# EAGLE board TM (EAGLE 6.6.0)
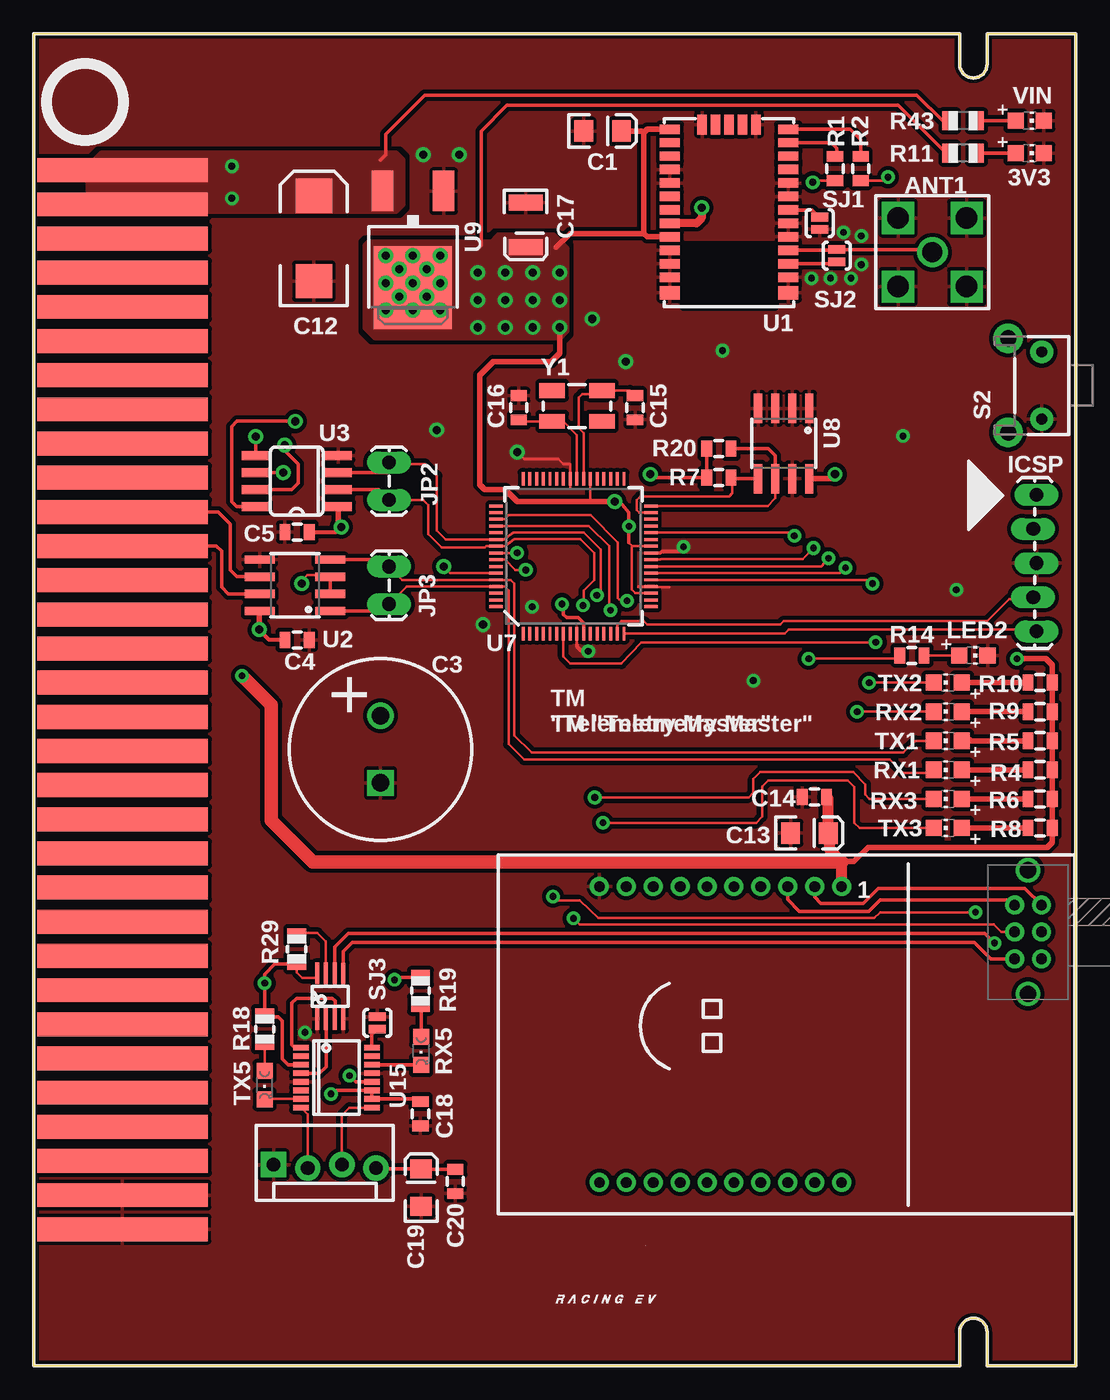
[diagram p0: board, top side]
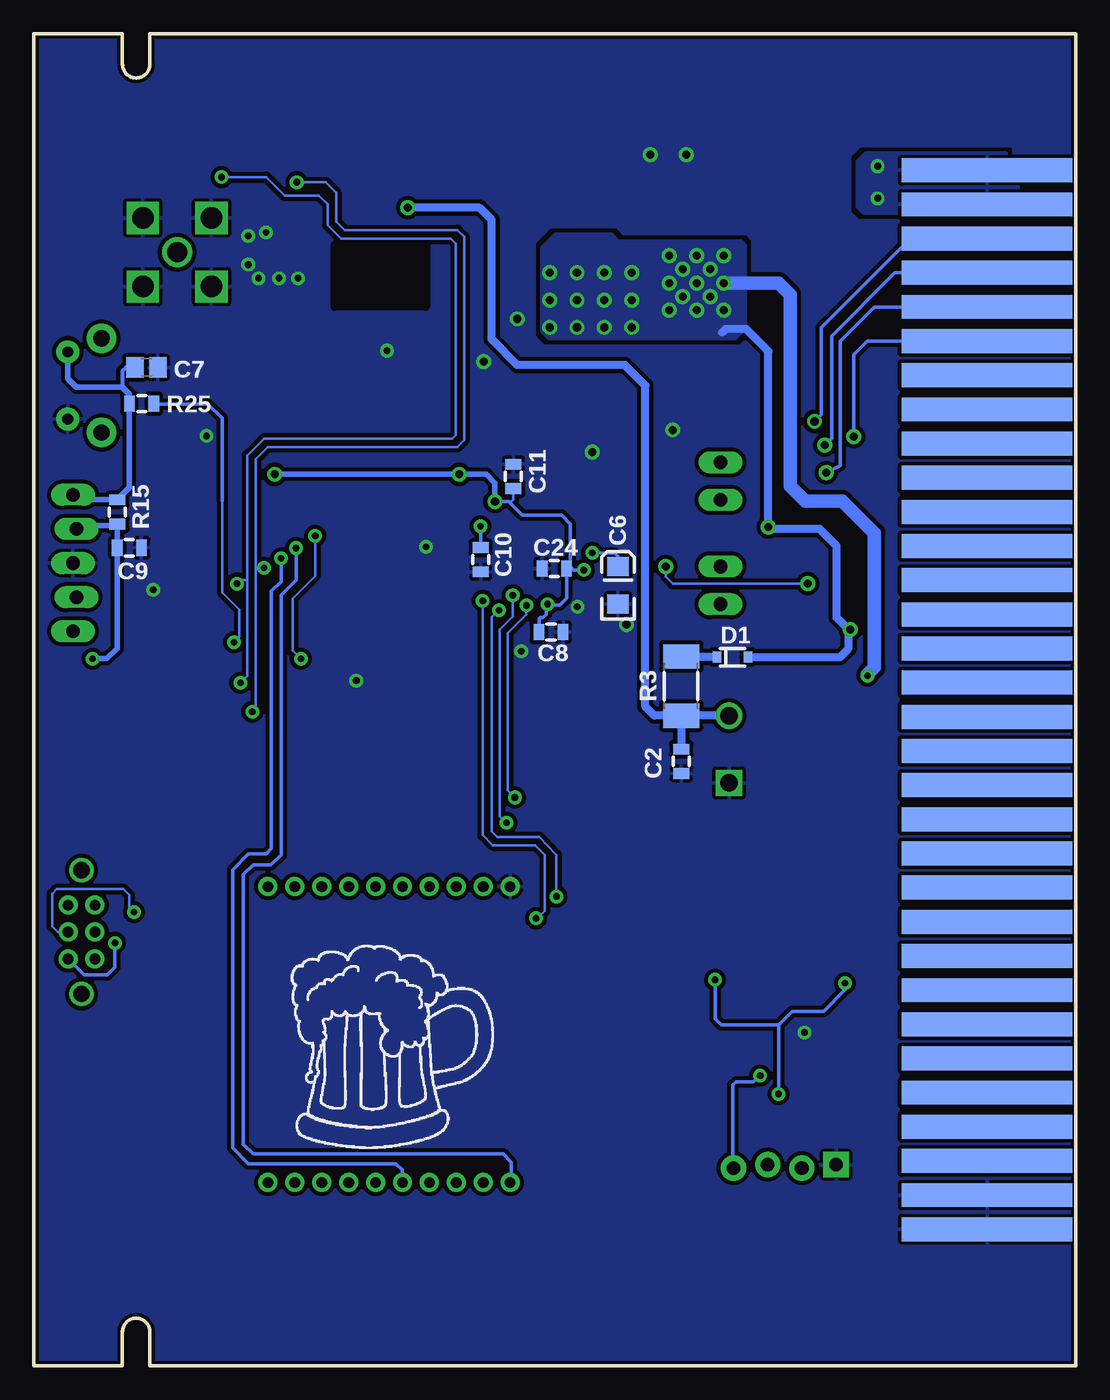
[diagram p1: board, bottom side, seen from below]

Size 77.47 x 99.06 mm. Coordinates in mm from the lower left corner, seen from the top.
Copper layers (1*16): Top 0.035mm / dielectric 1.5mm / Bottom 0.035mm
Design rules "SparkFun *": minimum track width 8mil, minimum drill 19mil, track to track 8mil, track to pad 8mil, pad to pad 8mil, via to via 8mil, smd to smd 8mil, copper to edge 10mil, drill to drill 8mil, minimum pad ring 12mil, minimum via ring 10mil, stop-mask expansion 4mil, vias tented up to drill 25mil, thermal gap 10mil

## Footprints (pad centres in the part's own frame; a part is rotated, then mirrored left to right if it is on the bottom)
CHIP-LED0805 = smd 1.2 x 1.2: A 0,-1.05; C 0,1.05
CONSMA002 = drill 1.6 square: 1 -2.55,2.55; 2 2.55,2.55; 3 2.55,-2.55; 4 -2.55,-2.55 | drill 1.5: C 0,0
EIA3216 = smd 1.4 x 1.6: A 1.4,0; C -1.4,0
0805 = smd 0.8 x 1.2: 1 -0.9,0; 2 0.9,0
DB-5R5D224T = drill 1.3: + 2.5,0 | drill 1.3 square: - -2.5,0
C0805 = smd 1.3 x 1.5: 1 -0.85,0; 2 0.85,0
EIA7343 = smd 2.55 x 2.7: A 3.17,0; C -3.17,0
EIA3528 = smd 1.2 x 2.5: A 1.65,0; C -1.65,0
CARD-64 = smd 1.778 x 12.7: 1 10.16,6.604; 2 12.7,6.604; 3 15.24,6.604; 4 17.78,6.604; 5 20.32,6.604; 6 22.86,6.604; 7 25.4,6.604; 8 27.94,6.604; 9 30.48,6.604; 10 33.02,6.604; 11 35.56,6.604; 12 38.1,6.604; 13 40.64,6.604; 14 43.18,6.604; 15 45.72,6.604; 16 48.26,6.604; 17 50.8,6.604; 18 53.34,6.604; 19 55.88,6.604; 20 58.42,6.604; 21 60.96,6.604; 22 63.5,6.604; 23 66.04,6.604; 24 68.58,6.604; 25 71.12,6.604; 26 73.66,6.604; 27 76.2,6.604; 28 78.74,6.604; 29 81.28,6.604; 30 83.82,6.604; 31 86.36,6.604; 32 88.9,6.604 | smd 1.778 x 12.7 bottom: 33 10.16,6.604; 34 12.7,6.604; 35 15.24,6.604; 36 17.78,6.604; 37 20.32,6.604; 38 22.86,6.604; 39 25.4,6.604; 40 27.94,6.604; 41 30.48,6.604; 42 33.02,6.604; 43 35.56,6.604; 44 38.1,6.604; 45 40.64,6.604; 46 43.18,6.604; 47 45.72,6.604; 48 48.26,6.604; 49 50.8,6.604; 50 53.34,6.604; 51 55.88,6.604; 52 58.42,6.604; 53 60.96,6.604; 54 63.5,6.604; 55 66.04,6.604; 56 68.58,6.604; 57 71.12,6.604; 58 73.66,6.604; 59 76.2,6.604; 60 78.74,6.604; 61 81.28,6.604; 62 83.82,6.604; 63 86.36,6.604; 64 88.9,6.604
SOD-323 = smd 0.63 x 0.83: 1 -1.15,0; 2 1.15,0
1X05_LOCK_LONGPADS = drill 1.016 long: 1 0,0; 2 2.54,-0.254; 3 5.08,0; 4 7.62,-0.254; 5 10.16,0
1X02_LOCK_LONGPADS = drill 1.016 long: 1 -0.127,0; 2 2.667,0
MOLEX-1X4_LOCK = drill 1.016 pad 1.88 square: 1 0,0.127 | drill 1.016 pad 1.88: 2 2.54,-0.127; 3 5.08,0.127; 4 7.62,-0.127
R2010 = smd 1.8 x 2.7: 1 -2.2,0; 2 2.2,0
R0805 = smd 1.1 x 1.4: 1 -1,0; 2 1,0
CHIPLED_0805 = smd 1.2 x 1.2: A 0,-1.05; C 0,1.05
EG2211 = drill 0.8: P1 -1,0; P1-TA -1,2; P1-TB -1,-2; P2 1,0; P2-TA 1,2; P2-TB 1,-2 | drill 1.2: P$7 0,4.6; P$8 0,-4.6
TACTILE-PTH-SIDEEZ = drill 0.8 pad 1.7: 1 -2.5,0; 2 2.5,0 | drill 1.2 pad 2.2: ANCHOR1 -3.5,2.5; ANCHOR2 3.5,2.5
SJ_2S-NO = smd 0.635 x 1.27: 1 -0.45,0; 2 0.45,0
PAD-JUMPER-2-NO_YES_SILK = smd 0.635 x 1.27: 1 -0.45,0; 2 0.45,0
CAM-M8Q = smd 1.5 x 0.7: 1 4.4,0; 2 4.4,1; 3 4.4,2; 4 4.4,3; 5 4.4,4; 6 4.4,5; 7 4.4,6; 8 4.4,7; 9 4.4,8; 10 4.4,9; 11 4.4,10; 12 4.4,11; 15 -4.4,11; 16 -4.4,10; 17 -4.4,9; 18 -4.4,8; 19 -4.4,7; 20 -4.4,6; 21 -4.4,5; 22 -4.4,4; 23 -4.4,3; 24 -4.4,2; 25 -4.4,1; 26 -4.4,0 | smd 1.5 x 1: 13 4.4,12.15; 14 -4.4,12.15 | smd 0.7 x 1.5: 27 -2,-0.35; 28 -1,-0.35; 29 0,-0.35; 30 1,-0.35; 31 2,-0.35
SO-8 = smd 0.61 x 2.21: 1 -1.905,-2.616; 2 -0.635,-2.616; 3 0.635,-2.616; 4 1.905,-2.616; 5 1.905,2.616; 6 0.635,2.616; 7 -0.635,2.616; 8 -1.905,2.616
SO08 = smd 0.66 x 2.032: 1 -1.905,-3.073; 2 -0.635,-3.073; 3 0.635,-3.073; 4 1.905,-3.073; 5 1.905,3.073; 6 0.635,3.073; 7 -0.635,3.073; 8 -1.905,3.073
VFSOP-8 = smd 0.3 x 1.6: 1 -0.98,-1.7; 2 -0.33,-1.7; 3 0.33,-1.7; 4 0.98,-1.7; 5 0.97,1.69; 6 0.325,1.7; 7 -0.33,1.7; 8 -0.98,1.71
RM024-TH = drill 0.8: 1 9,11; 2 7,11; 3 5,11; 4 3,11; 5 1,11; 6 -1,11; 7 -3,11; 8 -5,11; 9 -7,11; 10 -9,11; 11 -9,-11; 12 -7,-11; 13 -5,-11; 14 -3,-11; 15 -1,-11; 16 1,-11; 17 3,-11; 18 5,-11; 19 7,-11; 20 9,-11
TQFP-64 = smd 0.22 x 1: 1 -3.75,-5.75; 2 -3.25,-5.75; 3 -2.75,-5.75; 4 -2.25,-5.75; 5 -1.75,-5.75; 6 -1.25,-5.75; 7 -0.75,-5.75; 8 -0.25,-5.75; 9 0.25,-5.75; 10 0.75,-5.75; 11 1.25,-5.75; 12 1.75,-5.75; 13 2.25,-5.75; 14 2.75,-5.75; 15 3.25,-5.75; 16 3.75,-5.75; 33 3.75,5.75; 34 3.25,5.75; 35 2.75,5.75; 36 2.25,5.75; 37 1.75,5.75; 38 1.25,5.75; 39 0.75,5.75; 40 0.25,5.75; 41 -0.25,5.75; 42 -0.75,5.75; 43 -1.25,5.75; 44 -1.75,5.75; 45 -2.25,5.75; 46 -2.75,5.75; 47 -3.25,5.75; 48 -3.75,5.75 | smd 1 x 0.22: 17 5.75,-3.75; 18 5.75,-3.25; 19 5.75,-2.75; 20 5.75,-2.25; 21 5.75,-1.75; 22 5.75,-1.25; 23 5.75,-0.75; 24 5.75,-0.25; 25 5.75,0.25; 26 5.75,0.75; 27 5.75,1.25; 28 5.75,1.75; 29 5.75,2.25; 30 5.75,2.75; 31 5.75,3.25; 32 5.75,3.75; 49 -5.75,3.75; 50 -5.75,3.25; 51 -5.75,2.75; 52 -5.75,2.25; 53 -5.75,1.75; 54 -5.75,1.25; 55 -5.75,0.75; 56 -5.75,0.25; 57 -5.75,-0.25; 58 -5.75,-0.75; 59 -5.75,-1.25; 60 -5.75,-1.75; 61 -5.75,-2.25; 62 -5.75,-2.75; 63 -5.75,-3.25; 64 -5.75,-3.75
SO08' = smd 0.61 x 2.21: 1 -1.905,-2.616; 2 -0.635,-2.616; 3 0.635,-2.616; 4 1.905,-2.616; 5 1.905,2.616; 6 0.635,2.616; 7 -0.635,2.616; 8 -1.905,2.616
V-REG_DPACK = smd 1.6 x 3: 1 -2.28,-4.8; 3 2.28,-4.8 | smd 5.8 x 6.2: 4 0,2.38
SSOP-16 = smd 0.419 x 1.143: 1 -2.223,-2.642; 2 -1.587,-2.642; 3 -0.953,-2.642; 4 -0.318,-2.642; 5 0.318,-2.642; 6 0.953,-2.642; 7 1.587,-2.642; 8 2.223,-2.642; 9 2.223,2.642; 10 1.587,2.642; 11 0.953,2.642; 12 0.318,2.642; 13 -0.318,2.642; 14 -0.953,2.642; 15 -1.587,2.642; 16 -2.223,2.642
CRYSTAL-SMD-5X3 = smd 1.9 x 1.1: 1 -1.85,-1.15; 2 1.85,-1.15; 3 1.85,1.15; 4 -1.85,1.15

## Placement (x,y rotation side)
3V3  [CHIP-LED0805]  74.04,90.17 270 top
ANT1  CONMCX002  [CONSMA002]  66.8,82.8 0 top
C1  10uF  [EIA3216]  42.29,91.82 0 top
C2  1uF  [0805]  29.34,44.96 270 bottom
C3  DB-5R5D224T  [DB-5R5D224T]  25.78,45.85 90 top
C4  0.1uF  [0805]  19.58,53.98 0 top
C5  0.1uF  [0805]  19.58,62 180 top
C6  10uF  [EIA3216]  34.04,58.04 90 bottom
C7  10n  [C0805]  69.09,74.24 0 bottom
C8  0.1uF  [0805]  39.01,54.56 0 bottom
C9  0.1uF  [0805]  70.36,60.83 0 bottom
C10  0.1uF  [0805]  44.25,59.94 270 bottom
C11  0.1uF  [0805]  41.81,66.14 270 bottom
C12  10uF  [EIA7343]  20.83,83.82 90 top
C13  10uF  [EIA3216]  57.66,39.62 0 top
C14  1uF  [0805]  58.04,42.29 180 top
C15  12pF  [0805]  44.7,71.25 270 top
C16  12pF  [0805]  36.07,71.25 90 top
C17  10uf  [EIA3528]  36.58,84.84 270 top
C18  0.1uf  [0805]  28.75,18.75 270 top
C19  4.7uF  [EIA3216]  28.8,13.26 90 top
C20  0.1uf  [0805]  31.34,13.72 270 top
C24  0.1uF  [0805]  38.76,59.28 180 bottom
CARD2  CARD  [CARD-64]  0,99.06 270 top
D1  BAS316-TP  [SOD-323]  25.53,52.7 0 bottom
ICSP  ICSP  [1X05_LOCK_LONGPADS]  74.55,64.77 270 top
JP2  M02LOCK_LONGPADS  [1X02_LOCK_LONGPADS]  26.42,67.06 270 top
JP3  M02LOCK_LONGPADS  [1X02_LOCK_LONGPADS]  26.42,59.31 270 top
JP13  [MOLEX-1X4_LOCK]  17.83,14.83 0 top
LED2  [CHIP-LED0805]  69.85,52.83 270 top
R1  220  [0805]  59.56,89.03 270 top
R2  220  [0805]  61.47,89.03 270 top
R3  50  [R2010]  29.34,50.55 90 bottom
R4  1k  [0805]  74.8,44.32 180 top
R5  1k  [0805]  74.8,46.48 180 top
R6  1k  [0805]  74.8,42.16 180 top
R7  2k  [0805]  50.93,66.04 180 top
R8  1k  [0805]  74.8,40.01 180 top
R9  1k  [0805]  74.8,48.64 180 top
R10  1k  [0805]  74.8,50.8 180 top
R11  499  [R0805]  69.09,90.17 180 top
R14  499  [0805]  65.28,52.83 180 top
R15  10k  [0805]  71.25,63.5 270 bottom
R18  1K  [R0805]  17.17,25.04 90 top
R19  1k  [R0805]  28.75,27.89 90 top
R20  2k  [0805]  50.93,68.2 180 top
R25  499  [0805]  69.44,71.55 0 bottom
R29  1K  [R0805]  19.56,30.99 270 top
R43  1k  [R0805]  69.09,92.58 180 top
RX1  [CHIP-LED0805]  67.94,44.32 90 top
RX2  [CHIP-LED0805]  67.94,48.64 90 top
RX3  [CHIP-LED0805]  67.94,42.16 90 top
RX5  [CHIPLED_0805]  28.8,23.42 180 top
S1  [EG2211]  73.91,32.26 180 top
S2  ts  [TACTILE-PTH-SIDEEZ]  74.93,72.9 90 top
SJ1  NO  [SJ_2S-NO]  58.42,84.96 90 top
SJ2  NO  [SJ_2S-NO]  59.69,82.55 90 top
SJ3  [PAD-JUMPER-2-NO_YES_SILK]  25.55,25.5 270 top
TX1  [CHIP-LED0805]  67.94,46.48 90 top
TX2  [CHIP-LED0805]  67.94,50.8 90 top
TX3  [CHIP-LED0805]  67.94,40.01 90 top
TX5  [CHIPLED_0805]  17.17,20.88 180 top
U1  CAM-M8Q  [CAM-M8Q]  51.69,91.95 180 top
U2  SN75HVD08DR  [SO-8]  19.43,58.04 90 top
U3  ISL83077  [SO08]  19.56,65.79 90 top
U4  SN74LVC2G241DCTR  [VFSOP-8]  22.05,27.48 0 top
U5  RM024  [RM024-TH]  51.05,24.64 0 top
U7  DSPIC33EP256GM306  [TQFP-64]  40.13,60.2 0 top
U8  CAT24M01WI-GT3  [SO08']  55.75,68.58 180 top
U9  NCP1117DT33T5G  [V-REG_DPACK]  28.19,82.55 180 top
U15  FT230X  [SSOP-16]  22.5,21.44 270 top
U$1  BEERM  [B-M]  58.32,16.15 0 bottom
U$2  LOGO  [L-MS]  35.81,3.86 0 top
U$3  INDPK1  [PICKIT-PIN-1]  72.03,64.72 90 top
VIN  [CHIP-LED0805]  74.04,92.58 270 top
Y1  12Mhz  [CRYSTAL-SMD-5X3]  40.39,71.37 180 top

## Library data of the parts
3V3 C7 LED2 R11 R18 R19 R29 R43 RX1-RX3 RX5 TX1-TX3 TX5 VIN = adafruit
ANT1 C3 CARD2 U1 U2 U5 U7 U15 U$3 = FSAE Eletric
C1 C2 C13 C14 R1-R10 R14 R15 R20 SJ1-SJ3 = SparkFun-Passives
C4 C5 C8-C12 C15-C17 C24 = SparkFun-Capacitors
C6 = SparkFun-Capacitors; PROD_ID: CAP-00811
C18-C20 = SparkFun
D1 = SparkFun-DiscreteSemi
ICSP JP2 JP3 JP13 = SparkFun-Connectors
R25 = SparkFun-Resistors
S1 S2 = SparkFun-Electromechanical
U3 = NASA_LIB
U4 = Cleaverbrooks
U8 = SparkFun-DigitalIC
U9 = SparkFun-PowerIC
U$1 U$2 = Pic
Y1 = SparkFun-FreqCtrl

## Nets
3V: C18.1 R18.2 R19.2 R29.2 U4.8 U15.3 U15.10 U15.11
+3V3: C1.A C4.1 C5.1 C8.1 C9.1 C10.1 C11.2 C13.A C14.1 C17.A C24.1 D1.2 ICSP.2 R4.1 R5.1 R6.1 R7.2 R8.1 R9.1 R10.1 R11.2 R15.2 R20.2 U1.1 U1.9 U2.8 U3.1 U5.1 U7.10 U7.19 U7.26 U7.38 U7.57 U8.8 U9.4
+9V: C12.A CARD2.1 CARD2.2 CARD2.33 CARD2.34 R43.2 U9.3
CONNECTED: U5.15 U7.23
GND: 3V3.C ANT1.1 ANT1.2 ANT1.3 ANT1.4 C1.C C2.2 C3.- C4.2 C5.2 C6.C C7.2 C8.2 C9.2 C10.2 C11.1 C12.C C13.C C14.2 C15.2 C16.2 C17.C C18.2 C19.C C20.2 C24.2 CARD2.31 CARD2.32 CARD2.63 CARD2.64 ICSP.3 JP13.1 LED2.C S2.1 SJ1.1 SJ3.1 U1.4 U1.5 U1.10 U1.11 U1.12 U1.13 U1.14 U1.15 U1.18 U1.19 U1.21 U1.22 U1.27 U1.31 U2.5 U3.4 U4.1 U4.4 U5.10 U7.9 U7.20 U7.25 U7.41 U8.1 U8.2 U8.3 U8.4 U8.7 U9.1 U15.5 U15.13 VIN.C
GPS-RX: R2.2 TX2.C U7.21
GPS-TX: R1.2 RX2.C U7.22
HORNEN: U7.49
INRG: U7.50
N$1: R9.2 RX2.A
N$2: R1.1 U1.25
N$3: ANT1.C SJ2.2 U1.17
N$4: R2.1 U1.26
N$5: SJ1.2 U1.20
N$6: D1.1 R3.2
N$7: 3V3.A R11.1
N$8: C2.1 C3.+ R3.1 U1.8
N$9: R6.2 RX3.A
N$10: R8.2 TX3.A
N$11: R18.1 TX5.A
N$12: R14.2 U7.28
N$13: C16.1 U7.40 Y1.3
N$14: C15.1 U7.39 Y1.1
N$15: LED2.A R14.1
N$16: R7.1 U7.31 U8.5
N$17: SJ2.1 U1.16
N$18: R19.1 RX5.A
N$19: TX5.C U15.7
N$20: RX5.C U15.14
N$21: U4.2 U15.4
N$22: R4.2 RX1.A
N$23: R5.2 TX1.A
N$24: R10.2 TX2.A
N$27: U4.3 U15.1
N$28: JP13.3 U15.9
N$32: R20.1 U7.32 U8.6
N$33: R43.1 VIN.A
N$61: JP13.2 U15.8
N$62: SJ3.2 U15.16
N$69: R29.1 U4.7
N$85: C19.A C20.1 JP13.4 U15.12
N$86: C7.1 ICSP.1 R15.1 R25.1 S2.2
N$87: R25.2 U7.7
N$88: C6.A U7.56
N$90: ICSP.4 U7.15
N$91: ICSP.5 U7.16
RS-TM-A: CARD2.35 U3.8
RS-TM-B: CARD2.36 U3.7
RS-TM-Y: CARD2.38 U3.5
RS-TM-Z: CARD2.37 U3.6
RX: S1.P1 U7.52
RXD0: JP3.2 RX1.C U2.1 U7.61
RXD2: JP2.2 RX3.C U3.2 U7.55
RXD3: S1.P1-TA U4.6
RXD4: S1.P1-TB U5.2
SETUP: U5.11 U7.24
TSA: CARD2.11 U2.6
TSB: CARD2.12 U2.7
TX: S1.P2 U7.51
TXD0: JP3.1 TX1.C U2.4 U7.60
TXD2: JP2.1 TX3.C U3.3 U7.54
TXD3: S1.P2-TA U4.5
TXD4: S1.P2-TB U5.3
U3-EN: U2.2 U2.3 U7.59

## Tracks (layer width: path | path; a pad name or v marks a point on that pad's centre or on a via)
3V  (via drill 0.5)
  Top 0.203: R29.2 19.56,29.26 19.96,28.85 20.88,28.85 21.08,28.65 21.08,29.18 U4.8
  Top 0.254: R29.2 19.44,29.87 17.93,29.87 17.17,29.11 v17.17,28.45 R18.2 17.26,25.96 18.19,25.96 18.49,25.65 18.49,22.81 18.91,22.39 U15.3 | C18.1 28.55,19.85 U15.10 U15.11 22.36,20.48 v22.1,20.22 | R19.2 27.01,28.89 v26.82,28.7
  Bottom 0.254: v22.1,20.22 22.1,25.3 | 22.1,25.3 22.1,25.35 21.08,26.36 18.75,26.36 17.17,27.94 v17.17,28.45 | v26.82,28.7 26.82,25.81 26.36,25.35 22.15,25.35 22.1,25.3
+3V3  (via drill 0.5, 0.6)
  Top 0.203: U7.38 41.38,64.28 41.4,64.26 | U7.57 35.05,59.95 35.81,59.18 v36.58,59.18 | U7.26 44.51,60.95 | 44.51,60.95 44.25,61.21 | U7.19 44.71,57.45 44.45,57.71 44.45,60.88 44.51,60.95
  Top 0.254: R20.2 R7.2 46.1,66.04 v45.85,66.29 | R11.2 67.82,90.17 64.26,93.73 35.18,93.73 33.27,91.82 33.27,83.31 33.02,83.06 | U7.10 40.88,55.23 40.49,55.63 39.62,55.63 39.37,55.88 39.37,56.54 v39.27,56.64 | 44.25,61.21 v44.25,62.43 44.25,63.45 43.59,64.21 43.23,64.21 v43.18,64.26
  Top 0.305: C5.1 22.5,62 v22.86,62.36 | C4.1 17.53,53.98 v16.76,54.74
  Top 0.406: U3.1 22.63,62.59 v22.86,62.36 | v16.76,54.74 16.76,56.08 U2.8 | U1.9 45.59,83.95 45.34,84.2 | 45.34,84.2 45.34,91.69 | 45.34,91.69 45.59,91.95 U1.1 | C1.A 45.21,91.82 45.34,91.69 | 45.34,84.2 39.88,84.2 38.86,83.19 | U8.8 59.23,65.96 v59.56,66.29 | v39.12,77.22 39.12,75.31 38.48,74.68 34.16,74.68 33.15,73.66 33.15,65.53 33.53,65.15 35.05,65.15 35.94,64.26 41.4,64.26 v43.18,64.26 | 60.05,37.48 60.06,37.49 60.96,37.49 62.03,38.56 75.34,38.56 75.7,38.92 75.7,39.42 R8.1 R6.1 R4.1 R5.1 R9.1 R10.1 75.7,52.11 75.23,52.58 v73.1,52.58
  Top 0.813: U5.1 60.05,37.48 59.18,38.35 59.18,39.5 C13.A 59.06,42.17 C14.1
  Top 1.016: 60.05,37.48 20.73,37.48 17.68,40.54 17.68,49.12 v15.49,51.31
  Bottom 0.203: C11.2 41.81,64.41 41.96,64.26 42.32,64.26 | C24.1 37.74,59.28 37.59,59.44
  Bottom 0.254: v36.58,59.18 37.34,59.18 37.59,59.44 37.59,62.61 38.23,63.25 41.15,63.25 42.16,64.26 42.32,64.26 v43.18,64.26 43.23,63.96 | C8.1 39.88,54.6 39.88,55.58 39.83,55.63 39.62,55.63 39.37,55.88 39.37,56.54 v39.27,56.64 39.22,56.59 38.35,56.59 37.86,57.09 C24.1 | C10.1 v44.25,62.43
  Bottom 0.406: v59.56,66.29 v45.85,66.29 43.81,66.29 43.18,65.66 v43.18,64.26 | C9.1 71.26,61.42 | 71.26,61.42 71.26,62.59 R15.2 71.36,62.48 73.28,62.48 73.53,62.23 ICSP.2 | v73.1,52.58 72.03,52.58 71.27,53.34 71.27,61.4 71.26,61.42
  Bottom 0.61: D1.2 17.53,52.7 16.89,53.34 16.89,54.61 v16.76,54.74 16.89,54.74 17.78,55.63 17.78,60.96 19.05,62.23 22.73,62.23 v22.86,62.36 22.86,75.44 24.51,77.09 26.04,77.09 26.29,76.83
  Bottom 1.016: v15.49,51.31 15.49,51.41 14.99,51.92 14.99,61.92 17.37,64.31 20.12,64.31 21.23,65.43 21.23,79.65 22.1,80.52 v26.16,80.52
  other vias: 26.16,82.55 28.19,82.55 30.23,82.55 27.18,81.53 29.21,81.53 28.19,80.52 30.23,80.52 27.18,79.5 29.21,79.5 28.19,78.49 26.16,78.49 30.23,78.49 33.02,81.28 35.05,81.28 37.08,81.28 39.12,81.28 33.02,79.25 35.05,79.25 37.08,79.25 39.12,79.25 33.02,77.22 35.05,77.22 37.08,77.22
  pour Top (no thermals): 24.89,83.57 34.04,83.57 34.54,84.07 38.61,84.07 39.62,83.06 39.62,76.96 39.12,76.45 25.4,76.45 24.64,77.22 24.64,83.31
  pour Bottom: 24.64,83.31 24.89,83.57 34.04,83.57 34.54,84.07 38.61,84.07 39.62,83.06 39.62,76.96 39.12,76.45 25.4,76.45 24.64,77.22
+9V  (via drill 0.5)
  Top 0.254: R43.2 67.56,92.58 65.66,94.49 29.08,94.49 26.16,91.57 26.16,90.04 25.78,89.66
  other vias: 14.73,89.2 14.73,86.82
  pour Top (no thermals): 4.32,85.85 26.92,85.85 27.43,86.36 27.43,89.66 26.92,90.17 5.08,90.17 4.06,89.15 4.06,86.11
  pour Bottom: 4.27,85.9 4.27,89.26 5.18,90.17 15.65,90.17 16.26,89.56 16.26,86.16 15.8,85.7 4.47,85.7
CONNECTED  (via drill 0.5)
  Top 0.203: U7.23 58.53,59.45 v59.08,60.05
  Bottom 0.254: v59.08,60.05 59.08,58.32 59.79,57.61 59.79,38.46 60.2,38.05 61.52,38.05 62.69,36.88 62.69,16.2 61.52,15.04 50.55,15.04 50.09,14.58 50.09,13.67 U5.15
GND  (via drill 0.5, 0.6)
  Top 0.203: U7.41 | U7.41 39.88,67.06 39.37,67.06 38.99,67.44 36.45,67.44 v35.94,67.94 | U7.41 39.88,65.28 | U7.20 44.96,57.95 44.96,57.91 47.24,57.91 | U7.9 | U7.9 40.39,53.59 | U7.9 40.39,54.81
  Top 0.254: U7.25 46.58,60.45 46.69,60.55 47.95,60.55 v48.31,60.91
  Top 0.305: 40.39,53.59 40.39,53.49 40.64,53.24 41.12,53.24 v41.22,53.14
  other vias: 33.4,55.12 29.97,69.6 41.53,77.85 44.02,74.68 28.96,90.04 31.62,90.04 37.06,56.44 20.17,24.79 68.58,57.71 64.62,69.14 51.21,75.49 53.49,50.95 57.81,80.87 59.23,80.87 60.76,80.87 61.52,81.89 61.52,84.02 60.2,84.28
  pour Top (isolate 0.305, rank 5): 0,99.06 77.47,99.06 77.47,0 0,0
  pour Bottom (isolate 0.305, rank 5): 0,99.06 77.47,99.06 77.47,0 0,0
GPS-RX  (via drill 0.5)
  Top 0.203: R2.2 63.23,88.13 v63.5,88.39 | v62.1,50.8 TX2.C | U7.21 62.08,58.45 v62.36,58.17
  Bottom 0.203: v63.5,88.39 60.2,88.39 58.8,87 56.26,87 55.63,86.36 55.63,84.84 54.61,83.82 46.48,83.82 46.1,83.44 46.1,69.22 46.35,68.96 60.33,68.96 61.59,67.69 61.59,58.42 | 61.59,58.42 61.59,51.31 v62.1,50.8 | v62.36,58.17 62.1,58.42 61.59,58.42
GPS-TX  (via drill 0.5)
  Top 0.203: R1.2 58.03,88.13 v57.91,88.01 | v61.21,48.64 RX2.C | U7.22 59.91,58.95 v60.35,59.33
  Bottom 0.203: v57.91,88.01 55.75,88.01 54.99,87.25 54.99,85.09 54.36,84.45 45.97,84.45 45.47,83.95 45.47,68.83 45.97,68.33 60.07,68.33 60.96,67.44 60.96,59.13 | 60.96,59.13 60.96,48.9 v61.21,48.64 | v60.35,59.33 60.86,59.33 60.96,59.13
N$1
  Top 0.406: RX2.A R9.2
N$2
  Top 0.254: U1.25 59.29,90.95 59.69,90.55 59.69,90.05 R1.1
N$3
  Top 0.254: U1.17 59.64,82.95 SJ2.2 66.61,83 ANT1.C
N$4
  Top 0.254: U1.26 60.71,91.95 61.47,91.19 R2.1
N$5
  Top 0.254: U1.20 57.88,85.95 SJ1.2
N$6
  Bottom 0.61: D1.1 29.3,52.7 R3.2
N$7
  Top 0.254: R11.1 3V3.A
N$8  (via drill 0.6)
  Top 0.61: v49.66,86.11 49.66,85.34 49.28,84.96 47.3,84.96 U1.8
  Bottom 0.61: C3.+ R3.1 | R3.1 C2.1 | R3.1 31.33,48.35 32,49.02 32,72.9 33.53,74.42 41.53,74.42 43.43,76.33 43.43,85.22 44.32,86.11 v49.66,86.11
N$9
  Top 0.406: R6.2 RX3.A
N$10
  Top 0.406: R8.2 TX3.A
N$11
  Top 0.203: TX5.A R18.1
N$12  (via drill 0.5)
  Top 0.203: 64.39,52.84 R14.2 64.12,52.58 v57.61,52.58 | U7.28 56.31,61.95 v56.54,61.72
  Bottom 0.203: v56.54,61.72 56.54,58.73 58.22,57.05 58.22,53.19 v57.61,52.58
N$13
  Top 0.203: U7.40 40.38,69.22 39.37,70.23 38.48,70.23 38.35,70.1 Y1.3 36.19,70.22 C16.1
N$14
  Top 0.203: U7.39 40.88,69.35 40.51,69.72 40.51,72.01 40.77,72.26 41.98,72.26 Y1.1 44.33,72.52 C15.1
N$15
  Top 0.203: R14.1 LED2.A
N$16
  Top 0.203: U7.31 45.01,63.45 44.83,63.63 44.83,64.39 45.09,64.64 51.69,64.64 51.94,64.9 51.94,65.92 R7.1
  Top 0.254: U8.5 51.9,65.96 R7.1
N$17
  Top 0.254: U1.16 59.54,81.95 SJ2.1
N$18
  Top 0.254: RX5.A 28.8,26.84 R19.1
N$19
  Top 0.203: U15.7 17.19,19.85 TX5.C
N$20
  Top 0.254: RX5.C 25.17,22.37 U15.14
N$21
  Top 0.254: U15.4 21.25,21.75 21.74,22.25 21.74,25.76 U4.2
N$22
  Top 0.406: RX1.A R4.2
N$23
  Top 0.406: R5.2 69.65,46.48 69.55,46.58 69.1,46.58 TX1.A
N$24
  Top 0.406: TX2.A R10.2
N$27
  Top 0.254: U15.1 19.42,23.66 19.2,23.88 19.2,26.98 19.56,27.33 22.2,27.33 22.4,27.13 22.4,25.81 U4.3
N$28
  Top 0.203: JP13.3 22.91,18.64 23.47,19.2 25.13,19.2 U15.9
N$32
  Top 0.203: U7.32 54.55,63.95 55.12,64.52 U8.6
  Top 0.254: R20.1 54.61,68.2 55.12,67.69 U8.6
N$33
  Top 0.254: R43.1 VIN.A
N$61
  Top 0.203: JP13.2 20.37,18.71 U15.8
N$62
  Top 0.254: U15.16 25.15,24.64 SJ3.2
N$69
  Top 0.203: U4.7 21.72,31.57 21.08,32.21 19.78,32.21 R29.1
N$85  (via drill 0.5)
  Top 0.254: U15.12 23.94,21.12 v23.47,21.59 | JP13.4 25.5,14.66 C19.A 28.85,14.62 C20.1
  Bottom 0.254: v23.47,21.59 23.52,21.59 23.98,21.13 25.25,21.13 25.5,20.88 25.5,14.76 JP13.4
N$86
  Bottom 0.305: R25.1 70.36,71.53 | C7.1 70.59,74.24 70.87,73.97 70.87,72.77
  Bottom 0.406: ICSP.1 74.18,64.4 R15.1 70.36,65.29 70.36,71.53 70.36,72.26 70.87,72.77 74.3,72.77 74.93,73.41 S2.2
N$87  (via drill 0.5)
  Top 0.203: v62.59,53.8 45.16,53.8 43.69,52.22 39.88,52.22 39.37,52.73 39.37,54.44 U7.7
  Bottom 0.203: 63.45,64.31 63.45,57.51 62.18,56.24 62.18,54.2 v62.59,53.8
  Bottom 0.254: 63.45,64.31 63.45,70.46 64.52,71.53 68.52,71.53 R25.2
N$88  (via drill 0.5)
  Top 0.203: U7.56 35.68,60.45 v35.94,60.45
  Bottom 0.254: v35.94,60.45 34.29,60.45 34.04,60.2 C6.A
N$90
  Top 0.203: U7.15 43.38,55.07 43.69,55.37 45.34,55.37 45.59,55.12 55.5,55.12 55.75,55.37 70.87,55.37 72.52,57.02 74.17,57.02 ICSP.4
N$91
  Top 0.203: U7.16 55.84,54.45 56.13,54.74 74.42,54.74 ICSP.5
RS-TM-A  (via drill 0.6)
  Top 0.254: v19.43,70.23 15.11,70.23 14.73,69.85 14.73,64.26 15.11,63.88 U3.8
  Bottom 0.254: CARD2.35 12.32,83.82 18.92,77.22 18.92,70.74 v19.43,70.23
RS-TM-B  (via drill 0.6)
  Top 0.254: v18.67,68.45 18.67,68.07 19.68,67.06 19.68,65.66 19.18,65.15 U3.7
  Bottom 0.254: CARD2.36 13.46,81.28 18.16,76.58 18.16,68.96 v18.67,68.45
RS-TM-Y  (via drill 0.6)
  Top 0.254: v16.51,69.09 16.51,67.72 U3.5
  Bottom 0.254: CARD2.38 15.49,76.2 16.51,75.18 v16.51,69.09
RS-TM-Z  (via drill 0.6)
  Top 0.254: v18.54,66.42 U3.6
  Bottom 0.254: CARD2.37 14.99,78.74 17.53,76.2 17.53,66.93 v18.54,66.42
RX  (via drill 0.5)
  Top 0.203: U7.52 35.02,62.45 35.33,62.46 41.25,62.46 42.8,60.96 42.8,56.26 v42.88,56.19 | v70,33.73 62.94,33.73 62.48,33.33 41.96,33.33 40.59,34.59 38.96,34.59 v38.61,34.9
  Bottom 0.203: v42.88,56.19 42.93,56.19 43.43,55.68 43.43,39.73 43.03,39.32 39.88,39.32 38.61,38 v38.61,34.9 | S1.P1 75.69,32.26 76.1,32.66 76.1,35.1 75.74,35.46 70.81,35.46 70.36,35 70.36,34.09 v70,33.73
RXD0
  Top 0.203: JP3.2 27.72,57.95 U7.61 35.02,57.95 35.31,57.66 35.31,46.23 36.45,45.09 63.63,45.09 64.64,44.07 66.64,44.07 RX1.C
  Top 0.254: U2.1 25.91,56.13 JP3.2
RXD2  (via drill 0.5)
  Top 0.203: JP2.2 28.96,64.39 29.34,64.01 29.34,61.85 30.35,60.83 33.53,60.83 33.64,60.95 U7.55 35.06,60.95 35.74,61.47 40.64,61.47 41.66,60.45 41.66,58.42 40.89,57.66 40.89,56.59 v40.84,56.54 | v41.71,42.27 53.14,42.27 53.49,42.62 53.49,43.64 54,44.15 60.91,44.15 61.82,43.23 61.82,42.47 62.13,42.16 RX3.C
  Top 0.254: U3.2 25.65,65.15 JP2.2
  Bottom 0.203: v40.84,56.54 40.84,55.88 42.22,54.51 42.22,42.77 v41.71,42.27
RXD3  (via drill 0.5)
  Top 0.254: U4.6 22.37,31.16 23.37,32.16 70.71,32.16 v71.42,31.45
  Bottom 0.254: v71.42,31.45 71.42,29.62 71.98,29.06 73.71,29.06 S1.P1-TA
RXD4
  Top 0.254: U5.2 58.05,34.86 58.52,34.39 61.67,34.39 62.79,35.51 73.66,35.51 S1.P1-TB
SETUP  (via drill 0.5)
  Top 0.203: U7.24 46.59,59.95 46.63,59.99 57.15,59.99 v57.96,60.81
  Bottom 0.254: v57.96,60.81 57.96,58.42 59.08,57.3 59.08,38 59.84,37.24 61.16,37.24 61.87,36.52 61.87,16.46 61.16,15.75 42.57,15.75 41.96,15.14 41.96,13.73 U5.11
TSA
  Top 0.254: CARD2.11 13.72,63.5 14.61,62.61 14.61,59.18 15.11,58.67 U2.6
TSB
  Top 0.254: CARD2.12 13.59,60.96 13.97,60.58 13.97,57.91 14.48,57.4 U2.7
TX  (via drill 0.5)
  Top 0.203: U7.51 35.01,62.95 35.31,63.25 41.4,63.25 43.43,61.21 43.43,57.1 43.54,57 43.99,57 v44.09,56.9 | S1.P2 71.93,32.26 71.37,32.82 40.59,32.82 v40.13,33.27
  Bottom 0.203: v44.09,56.9 44.09,39.47 43.33,38.71 40.18,38.71 39.47,38 39.47,33.83 40.03,33.27 v40.13,33.27
TXD0
  Top 0.203: JP3.1 27.4,58.45 U7.60 35.46,58.45 35.74,58.17 35.74,46.86 37.01,45.59 64.64,45.59 65.53,46.48 TX1.C
  Top 0.254: U2.4 25.91,59.94 JP3.1
TXD2  (via drill 0.5)
  Top 0.203: 26.92,67.06 29.08,67.06 29.97,66.17 29.97,62.1 30.63,61.45 U7.54 34.96,61.45 35.64,61.98 40.89,61.98 42.16,60.71 42.16,57.61 v41.86,57.3 | v42.32,40.39 53.7,40.39 54.15,40.84 54.15,43.08 54.61,43.54 60.5,43.54 61.01,43.03 61.01,40.39 61.42,39.98 66.87,39.98 TX3.C
  Top 0.254: U3.3 26.29,66.42 26.92,67.06 26.54,67.06 JP2.1
  Bottom 0.203: v41.86,57.3 41.86,55.73 42.82,54.76 42.82,40.84 v42.32,40.39
TXD3
  Top 0.254: S1.P2-TA 71.14,30.26 69.9,31.5 23.67,31.5 23.01,30.84 U4.5
TXD4
  Top 0.254: U5.3 56.05,34.67 56.9,33.78 62.08,33.78 62.94,34.65 72.53,34.65 S1.P2-TB
U3-EN  (via drill 0.6)
  Top 0.203: U7.59 30.97,58.95 v30.48,59.44 | v19.94,58.17 19.94,58.42 20.32,58.8 21.92,58.8 U2.3
  Top 0.254: U2.2 U2.3
  Bottom 0.203: v30.48,59.44 30.48,58.67 29.97,58.17 v19.94,58.17

## Text on the board
tNames: TM / "Telemetry Master"
_tsilk: + | VIN | R1 | R2 | R43 | R11 | + | C1 | 3V3 | ANT1 | SJ1 | U9 | C17 | SJ2 | C12 | U1 | Y1 | C15 | U3 | C16 | U8 | S2 | R20 | JP2 | R7 | ICSP | C5 | JP3 | U2 | R14 | LED2 | + | C3 | U7 | C4 | TX2 | R10 | + | RX2 | R9 | + | TM "Telemetry Master" | TX1 | + | R5 | RX1 | + | R4 | C14 | RX3 | + | R6 | TX3 | + | R8 | C13 | + | 1 | R29 | SJ3 | R19 | RX5 | TX5 | R18 | C18 | U15 | C20 | C19
_bsilk: C7 | R25 | C11 | R15 | C24 | C10 | C6 | C9 | D1 | C8 | R3 | C2